# Altium PCB Circuit.PcbDoc (part 2 of 2)
Units mm, origin at the board's own origin, x right, y up, seen from the top; angles counter-clockwise.
Board outline 134.47 x 95.89 mm, 2 copper layers (Top Layer, Bottom Layer); 91 components, 54 nets, 361 pads, 33 vias.
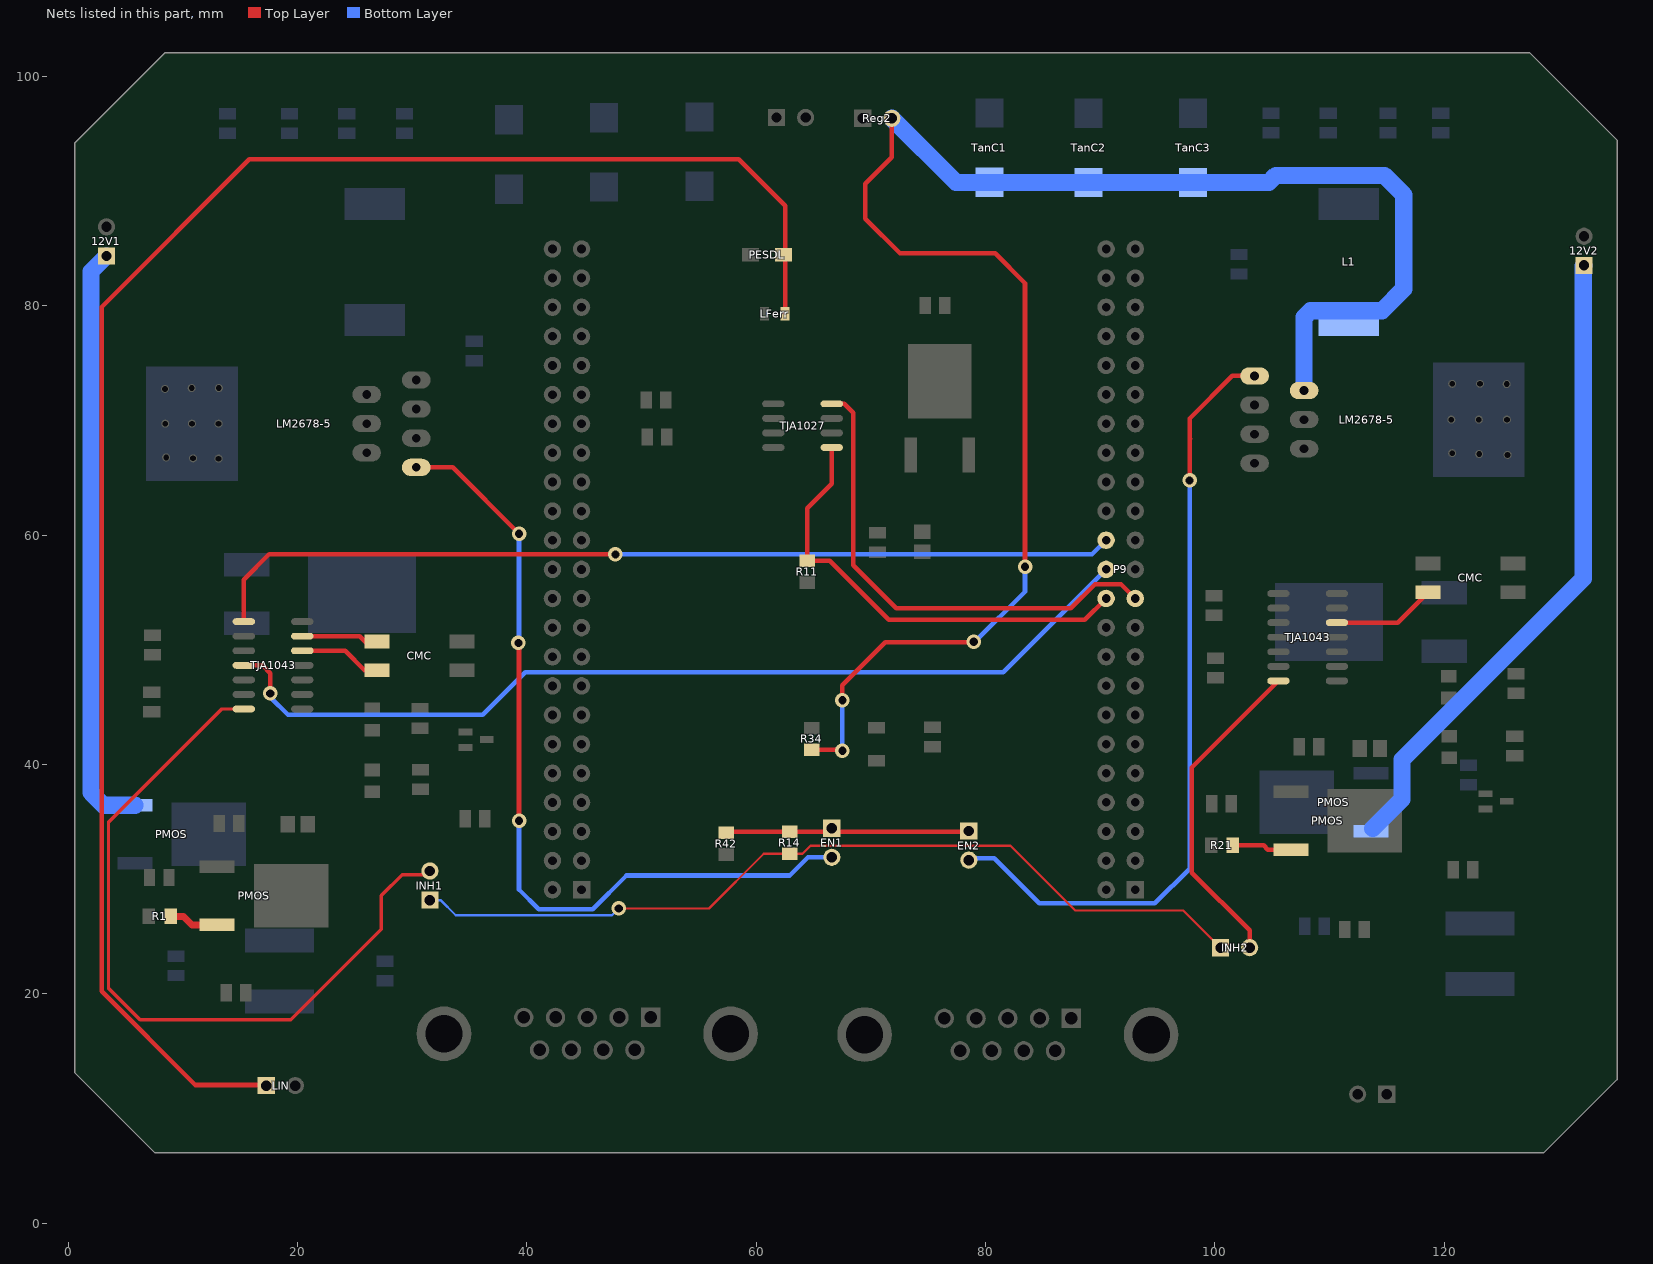
[diagram p2: the nets of this part, all layers, seen from the top]

## Via types
v1: diameter 1.27, hole 0.711, Top Layer to Bottom Layer, 33 vias

## Nets (pads, with @x,y where several pads share a name; then routed paths per layer and width w, separated by ;. In a path a pad name is that pad's centre, name@x,y a point inside that pad or via, vN(x,y) a via of type N, cw(c..) or ccw(c..) an arc to the next point about the centre after c; other vN are vias at no path point) (continued)
NetCMC2_IN2: CMC.IN2@118.6,55.025 TJA1043.CANL@110.65,52.37 | length 9
  Top Layer w0.4: TJA1043.CANL@110.65,52.37 115.945,52.37 CMC.IN2@118.6,55.025
NetCMC_IN1: CMC.IN1@26.95,50.725 TJA1043.CANH@20.425,51.19 | length 7
  Top Layer w0.4: TJA1043.CANH@20.425,51.19 25.435,51.19 26.225,50.4 26.625,50.4 CMC.IN1@26.95,50.725
NetCMC_IN2: CMC.IN2@26.95,48.225 TJA1043.CANL@20.425,49.92 | length 7.4
  Top Layer w0.4: TJA1043.CANL@20.3,49.92 TJA1043.CANL@20.425,49.92 24.155,49.92 25.85,48.225 CMC.IN2@26.95,48.225
NetJ_12V1_1: 12V1.1 PMOS.S@5.825,36.454 | length 51.6
  Bottom Layer w1.5: 12V1.1@3.35,84.35 2,83 2,37.55 3.096,36.454 PMOS.S@5.825,36.454
NetJ_12V2_1: 12V2.1 PMOS.S@113.6,34.171 | length 56.7
  Bottom Layer w1.5: PMOS.S@113.775,34.425 116.325,36.975 116.325,40.425 132.125,56.225 132.125,83.45 12V2.1@132.2,83.525
NetJ_EN1_1: EN1.1 EN2.1 R14.2 R42.2 | length 21.2
  Top Layer w0.4: R42.2@57.475,34.125 R14.2@62.925,34.125 69.4,34.125 ; 69.325,34.125 EN2.1@78.55,34.125
NetJ_EN1_2: EN1.2 LM2678-5.EN@30.358,65.915 | length 72.2
  Top Layer w0.4: LM2678-5.EN@30.358,65.915 33.535,65.915 v1(39.325,60.125) ; v1(39.325,35.1) v1@39.325,50.55
  Bottom Layer w0.4: v1(39.275,50.6) 39.325,50.65 v1(39.325,60.125) ; v1(39.325,35.1) 39.325,29.1 41.05,27.375 45.75,27.375 48.7,30.325 62.94,30.325 64.525,31.91 EN1.2@66.6,31.91
NetJ_EN2_2: EN2.2 LM2678-5.EN@103.467,73.885 | length 69
  Top Layer w0.4: v1(97.8,64.775) 97.8,68.35 ; 97.825,68.1 97.825,70.175 101.535,73.885 LM2678-5.EN@103.467,73.885 ; 97.825,68.4 97.85,68.4
  Bottom Layer w0.4: EN2.2@78.55,31.66 78.715,31.825 80.775,31.825 84.7,27.9 94.775,27.9 97.8,30.925 v1(97.8,64.775) v1@97.85,64.775
NetJ_INH2_1: INH1.1 INH2.1 R14.1 | length 75.7
  Top Layer w0.2: v1(48.025,27.45) 55.9,27.45 60.675,32.225 R14.1@62.925,32.225 64.05,32.225 64.735,32.91 82.19,32.91 87.825,27.275 97.25,27.275 INH2.1@100.5,24.025
  Bottom Layer w0.2: INH1.1@31.55,28.175 32.475,28.175 33.8,26.85 47.425,26.85 v1(48.025,27.45)
NetJ_INH2_2: INH2.2 TJA1043.INH@105.55,47.29 | length 28.5
  Top Layer w0.4: INH2.2@103.04,24.025 103.04,25.535 98,30.575 98,39.74 TJA1043.INH@105.55,47.29
NetJ_INH_2: INH1.2 TJA1043.INH@15.325,44.84 | length 66.2
  Top Layer w0.3: TJA1043.INH@15.325,44.84 13.39,44.84 3.525,34.975 3.525,20.5 6.275,17.75 19.425,17.75 27.325,25.65 27.325,28.575 29.14,30.39 INH1.2@31.275,30.39
NetL1_U_5v_REG_2_2: L1.2@111.675,78.775 LM2678-5.FB@107.785,72.615 R34.1 Reg2.2 TanC1.1@80.35,90.775 TanC2.1@89,90.75 TanC3.1@98.1,90.75 | length 152.8
  Top Layer w0.4: R34.1@64.85,41.275 67.45,41.275 v1(67.525,41.2) ; v1(67.525,45.6) 67.525,46.9 71.275,50.65 v1@79.025,50.65 ; Reg2.2@71.84,96.35 71.84,92.965 69.525,90.65 69.525,87.6 72.55,84.575 80.85,84.575 83.45,81.975 v1(83.45,57.25)
  Bottom Layer w0.4: v1(67.525,41.2) v1(67.525,45.6) ; v1(78.975,50.7) 79.075,50.7 83.45,55.075 v1(83.45,57.25)
  Bottom Layer w1.5: Reg2.2@71.84,96.35 77.44,90.75 TanC2.1@89,90.75 TanC3.1@98.1,90.75 104.7,90.75 105.325,91.375 114.775,91.375 116.475,89.675 116.475,81.475 114.575,79.575 108.35,79.575 107.785,79.01 LM2678-5.FB@107.785,72.615
NetLFerrite_2: LFerr.2 LIN.1 PESDL.D2 | length 153.6
  Top Layer w0.4: LIN.1@17.275,12.05 11.1,12.05 2.925,20.225 2.925,79.9 15.8,92.775 58.475,92.775 62.525,88.725 LFerr.2@62.525,79.1
NetPMOS_U_EMI_Prot_Circ1_S: PMOS.S@13,26.021 R1.1 | length 4.4
  Top Layer w0.6: R1.1@8.95,26.75 10.075,26.75 10.804,26.021 PMOS.S@13,26.021
NetPMOS_U_EMI_Prot_Circ2_S: PMOS.S@106.625,32.571 R21.1 | length 5.2
  Top Layer w0.4: R21.1@101.575,32.95 104.25,32.95 104.629,32.571 PMOS.S@106.625,32.571
UART1_RXD: P9.26 TJA1043.TXD@15.325,52.46 | length 80.3
  Top Layer w0.4: TJA1043.TXD@15.325,52.46 15.325,56.125 17.525,58.325 v1(47.725,58.325)
  Bottom Layer w0.4: v1(47.725,58.325) 89.289,58.325 P9.26@90.522,59.558
UART1_TXD: P9.24 TJA1043.RXD@15.325,48.65 | length 83.5
  Top Layer w0.4: TJA1043.RXD@15.325,48.65 16.95,48.65 17.625,47.975 v1(17.625,46.2)
  Bottom Layer w0.4: v1(17.625,46.2) 17.625,45.875 19.175,44.325 36.15,44.325 39.875,48.05 81.554,48.05 P9.24@90.522,57.018
UART2_RXD: P9.22 R11.1 TJA1027.RXDL | length 39.7
  Top Layer w0.4: TJA1027.RXDL@66.6,67.645 66.6,64.5 64.45,62.35 R11.1@64.45,57.775 66.425,57.775 71.575,52.625 88.669,52.625 P9.22@90.522,54.478
UART2_TXD: P9.21 TJA1027.TXDL | length 43
  Top Layer w0.4: TJA1027.TXDL@66.6,71.455 67.695,71.455 68.475,70.675 68.475,57.375 72.225,53.625 87.45,53.625 89.55,55.725 91.815,55.725 P9.21@93.062,54.478
pads on no net: CANC1.1 CANC1.3 CANC1.4 CANC1.6 CANC1.8 CANC1.9 CANC1.10 CANC1.11 CANC2.1 CANC2.3 CANC2.4 CANC2.6 CANC2.8 CANC2.9 CANC2.10 CANC2.11 LM2678-5.NC P8.1 P8.2 P8.3 P8.6 P8.7 P8.8 P8.9 P8.10 P8.11 P8.13 P8.14 P8.15 P8.16 P8.19 P8.20 P8.21 P8.22 P8.24 P8.25 P8.27 P8.28 P8.29 P8.30 P8.31 P8.32 P8.33 P8.34 P8.35 P8.36 P8.37 P8.38 P8.39 P8.40 P8.41 P8.42 P8.43 P8.44 P8.45 P8.46 P9.1 P9.2 P9.3 P9.4 P9.5 P9.6 P9.7 P9.8 P9.9 P9.10 P9.11 P9.12 P9.13 P9.14 P9.15 P9.16 P9.17 P9.18 P9.23 P9.25 P9.27 P9.28 P9.29 P9.30 P9.31 P9.32 P9.33 P9.34 P9.35 P9.36 P9.37 P9.38 P9.39 P9.40 P9.41 P9.42 P9.43 P9.44 P9.45 P9.46 TJA1027.NC

## Polygon pours and split planes (outlines as drawn)
NetC1_U_5v_REG_2_2 on Bottom Layer "123" (solid, remove dead copper, pour order 144): 124.025,86.124 122.851,87.25 119.985,87.25 119.985,80.31 117.802,78.215 115.4,75.911 115.4,74.575 115.946,74.575 120.968,79.394 121.35,79.76 121.35,83.374 121.35,85.26 122.497,86.36 123.97,86.36 119.276,86.36 119.194,86.438
NetC1_U_5v_REG_2_2 on Bottom Layer "123" (solid, remove dead copper, pour order 143): 114.275,75.825 114.125,75.975 110.375,75.975 110.375,74.8 110.3,74.725 110.425,74.6 113.875,74.6 113.875,75.425 114.275,75.825
NetC1_U_5v_REG_2_2 on Bottom Layer "123" (solid, remove dead copper, pour order 142): 129.224,87.389 122.401,93.991 121.3,93.991 121.235,93.991 119.4,92.215 120.48,91.17 120.48,86.072 129.461,86.072 130.746,87.315 131.275,87.827 131.275,88.475 131.275,88.559 123.33,96.247 123.092,96.017 121.3,96.017 121.3,93.427 121.775,92.967
NetC2_2 on Bottom Layer "123" (solid, remove dead copper, pour order 131): 68.825,94.55 65.999,97.376 63.921,97.376 63.921,94.579 64.225,94.275 64.35,94.15 68.525,94.15 68.525,94.3 68.8,94.575
NetBAT_IN_2 on Bottom Layer "123" (solid, remove dead copper, pour order 122): 16.3,35.1 16.3,35.55 16.803,36.025 16.883,36.1 18.472,36.1 19.082,36.1 19.771,35.45 19.982,35.25 19.982,29.575 19.982,29.5 21.625,27.95 20.963,27.325 18.87,27.325 18.87,32.675 16.3,35.1
NetBAT_IN_2 on Bottom Layer "123" (solid, remove dead copper, pour order 120): 17.65,35.8 17,35.8 16.525,35.325 16.3,35.1 16.3,27.375 19.55,27.375 19.85,27.675 19.425,28.1 19.425,34.4 19.425,34.725 18.3,35.85 18.275,35.825 17.025,35.825
NetCc1_U_5v_REG_1_1 on Bottom Layer "123" (solid, remove dead copper, pour order 119): 29.098,69.777 29.1,69.775 29.1,69.575 29.1,69.525 29.225,69.4 29.25,69.375 31.425,69.375 33.2,69.375 38,74.175 38.175,74.35 38.175,77.075 35.75,77.075 33.95,75.275 29.098,70.423 29.098,69.777
NetCc1_U_5v_REG_1_1 on Bottom Layer "123" (solid, remove dead copper, pour order 117): 29.05,72.125 29.05,72.1 28.55,71.6 28.55,71.3 28.55,70.325 28.95,69.925 29.1,69.775 31.425,69.775 32,69.775 36.7,74.475 36.925,74.7 36.925,76.35 36.925,76.85 36.45,77.325 36.375,77.4 34.65,77.4 34.65,77.05 30.25,72.65 28.9,72.65 28.725,72.65 27.95,71.875 28,71.825 28,70.625 28.25,70.625 28.625,70.25
NetCc1_U_5v_REG_1_2 on Bottom Layer "123" (solid, remove dead copper, pour order 115): 35.662,75.975 38.038,75.975 38.837,76.775 37.437,78.175 37.437,78.575 37.063,78.575 35.188,76.7 35.662,76.225 35.662,75.975
NetCc1_U_5v_REG_1_2 on Bottom Layer "123" (solid, remove dead copper, pour order 112): 29.3,74.05 29.3,72.85 29.875,72.275 29.95,72.35 31.425,72.35 32.05,72.35 35.8,76.1 36.2,76.5 37.75,76.5 37.75,65.425 36.527,64.202 37.604,63.125 39.65,63.125 39.65,79.1 38.475,80.275 37.775,79.575 35.15,79.575 34.7,79.575 29.3,74.175 29.3,73.45
NetCc1_U_5v_REG_1_2 on Bottom Layer "123" (solid, remove dead copper, pour order 111): 29.3,74.425 29.3,75.175 33.525,79.4 33.675,79.55 33.675,81.55 33.675,81.675 30.25,85.1 28.225,87.125 28.225,88.2 31.525,88.2 39.7,80.025 34.1,74.425 29.3,74.425
NetCc1_U_5v_REG_1_2 on Bottom Layer "123" (solid, remove dead copper, pour order 108): 24.8,90.725 24.725,90.8 23.775,90.8 23.775,90.3 23.375,89.9 23.35,89.875 23.35,87.775 23.35,87.7 23.925,87.125 24.2,86.85 28.775,86.85 28.85,86.85 31.55,84.15 34,81.7 34,80.225 34,79.125 29.4,74.525 29.3,74.425 29.3,73.35 31.525,73.35 37.075,78.9 37.1,78.925 39.025,78.925 39.275,78.925 39.725,78.475 39.9,78.3 39.9,66.975 39.3,66.975 37,64.675 36.527,64.202 35.197,64.202 35.2,64.202 38.744,60.658 41.2,63.113 41.2,69.325 41.2,79.35 30.3,90.25 30.025,90.525 23.95,90.525
NetC1_U_5v_REG_1_2 on Bottom Layer "123" (solid, remove dead copper, pour order 107): 1.612,85.536 1.612,87.537 2.225,88.42 2.35,88.6 4.35,88.6 10.7,88.6 11.9,90.329 12.35,89.681 12.35,87.123 2.078,87.123 1.612,86.453
NetC1_U_5v_REG_1_2 on Bottom Layer "123" (solid, remove dead copper, pour order 105): 30.1,93.889 29.407,93.225 16.036,93.225 14.914,92.15 14.679,91.925 14.679,84.925 14.679,84.9 20.759,79.075 27.099,73 27.099,71.75 24.203,71.75 13.74,81.775 11,84.4 11,94.975 11,95.15 12.096,96.2 12.2,96.3 15.853,96.3 27.647,96.3 30.048,94
NetC2_2 on Bottom Layer "123" (solid, remove dead copper, pour order 103): 36.3,90.175 36.275,90.2 22.05,90.2 22.05,91.95 22.575,92.475 22.625,92.525 34.85,92.525 34.85,91.625 36.225,90.25
NetC2_2 on Bottom Layer "123" (solid, remove dead copper, pour order 101): 63.921,97.376 63.921,97.4 64.998,97.4 66.099,96.322 66.45,95.979 66.45,94.118 66.45,93.799 64.747,92.133 59.84,87.332 38.081,87.332 37.405,87.332 34.25,90.419 34.125,90.541 25.562,90.541 23.208,90.541 22.757,90.1 21.906,89.267 21.906,86.181 21.906,86.132 26.864,81.282 27.439,80.718 28.741,80.718 29.017,80.718 29.918,79.836 30.069,79.689 30.069,77.313 30.069,77.117 28.967,76.04 28.842,75.917 28.842,73.1 26.864,73.1 22.932,76.946 22.782,77.093 22.782,79.959 22.782,80.008 18.526,84.172 18.125,84.564 18.125,90.247 18.125,90.835 20.253,92.917 20.378,93.04 28.867,93.04 59.489,93.04 63.921,97.376
NetC1_U_5v_REG_1_2 on Bottom Layer "123" (solid, remove dead copper, pour order 99): 2.088,87.258 1.637,86.805 1.637,85.721 1.637,85.545 2.113,85.066 2.263,84.915 9.641,84.915 10.441,84.915 20.421,74.86 24.773,70.475 26.798,70.475 27.124,70.475 27.374,70.727 27.649,71.004 27.649,72.264 26.973,72.264 24.272,74.986 14.818,84.511 14.818,86.149 14.818,92.248 16.194,93.634 16.369,93.81 25.373,93.81 30.1,93.81 30.4,94.112 30.475,94.188 30.475,95.272 30.475,95.902 30,96.38 29.825,96.557 13.843,96.557 13.618,96.557 12.417,95.347 12.267,95.196 12.267,89.249 12.267,89.198 11.267,88.191 10.942,87.863 2.838,87.863 2.688,87.863 1.663,86.83
NetJ_12V1_1 on Bottom Layer "123" (solid, remove dead copper, pour order 97): 8.275,35.632 8.275,36.869 7.886,37.222 7.47,37.601 4.694,37.601 4.639,37.601 4.389,37.828 4.25,37.954 4.25,41.237 4.25,82.445 4.417,82.596 5.055,83.177 5.055,84.339 5.055,84.591 4.167,85.399 4.056,85.5 2.446,85.5 2.391,85.5 1.253,84.465 1.225,84.44 1.225,83.531 1.225,36.136 2.335,35.127 2.502,34.975 7.637,34.975 7.664,34.975 8.247,35.505
NetC2_U_EMI_Prot_1_1 on Bottom Layer "123" (solid, remove dead copper, pour order 95): 22.325,19.95 19.325,22.95 15.85,22.95 15.85,23.675 14.95,24.575 14.775,24.75 14.775,29.8 14.775,30.4 15.475,31.1 16.05,31.675 16.05,36.2 16.05,36.35 15.625,36.775 15.55,36.85 9.15,36.85 8.95,36.85 8.625,36.525 8.675,36.475 8.675,31.55 8.675,31.45 9.3,30.825 10.975,29.15 10.975,25.575 10.975,24.725 8.6,22.35 8.275,22.025 8.275,20.975 8.275,20.775 10.675,18.375 11.45,17.6 21.475,17.6 21.55,17.6 22.325,18.375 22.325,19.925
NetBAT_IN_2 on Bottom Layer "123" (solid, remove dead copper, pour order 93): 94.75,17.025 94.75,17.675 92.475,19.95 92.275,20.15 88.25,20.15 30.5,20.15 28.575,22.075 26.825,23.825 26.825,25.875 29.65,25.875 30.325,26.55 62.275,26.55 96.3,26.55 100.85,22 95.65,16.8 95.15,16.8 95.15,17.3 94.575,17.875
NetCc1_U_5v_REG_2_1 on Bottom Layer "123" (solid, remove dead copper, pour order 91): 104.9,68.3 104.9,69.525 104.2,70.225 102.825,70.225 102.825,68.425 103.4,67.85 103.85,68.3 104.9,68.3
NetCc1_U_5v_REG_2_1 on Bottom Layer "123" (solid, remove dead copper, pour order 90): 104.65,68.875 104.65,69.45 104.3,69.8 103.9,70.2 103.15,70.2 102.95,70.2 101.825,71.325 101.775,71.375 101.775,75.275 101.775,79.5 103.8,81.525 104.175,81.9 104.175,84.075 99.8,84.075 97.35,81.625 97.45,81.525 97.45,70.9 98.35,70.9 101.625,67.625 104.15,67.625 104.225,67.625 104.85,68.25 104.9,68.3 104.9,69.35 104.9,69.525 104.175,70.25 104.15,70.225 103.825,70.225
NetCc1_U_5v_REG_2_2 on Bottom Layer "123" (solid, remove dead copper, pour order 89): 103.325,83.75 113.075,83.75 116.075,86.75 116.5,87.175 116.5,89.275 107.725,89.275 103,84.55 103.325,84.225 103.325,83.75
NetCc1_U_5v_REG_2_2 on Bottom Layer "123" (solid, remove dead copper, pour order 88): 105.375,62.2 105.375,62.15 104.675,62.85 104.675,66.3 104.675,66.35 103.975,67.05 103.725,67.3 102.3,67.3 101.925,67.3 98.625,70.6 98.4,70.825 98.4,81.85 98.4,81.95 100.25,83.8 100.475,83.575 102.5,83.575 103.175,83.575 106.925,87.325 106.95,87.3 108.1,87.3 108.15,87.3 108.7,86.75 108.825,86.625 113.95,86.625 114.925,86.625 115.925,87.625 116.275,87.975 116.275,90.425 116.275,90.55 115.3,91.525 115.05,91.775 108.875,91.775 105.175,91.775 100.2,86.8 99.8,86.4 96.75,86.4 96.55,86.4 95.45,85.3 95.375,85.225 95.375,70.7 95.375,70.15 100.425,65.1 100.65,64.875 100.65,64.3 100.65,64.254 100.325,63.929 102.704,61.55 104.65,61.55 104.75,61.55 105.375,62.175 105.304,62.246 105.304,62.455
NetC1_U_5v_REG_2_2 on Bottom Layer "123" (solid, remove dead copper, pour order 87): 102.962,93.688 101.688,93.688 100.85,94.525 100.85,96.05 100.85,96.125 101.65,96.925 104.175,96.925 104.175,95.4 104.6,94.975 103.313,93.688 102.962,93.688
NetL1_U_5v_REG_2_2 on Bottom Layer "123" (solid, remove dead copper, pour order 86): 107.922,72.865 107.987,72.8 109.037,72.8 109.287,72.8 109.712,73.225 109.937,73.45 109.937,76.55 109.937,76.825 110.212,77.1 110.462,77.35 114.037,77.35 115.612,77.35 119.087,80.825 119.337,81.075 119.337,92.65 119.337,92.725 117.387,94.675 117.087,94.375 103.687,94.375 102.837,94.375 102.187,93.725 101.862,93.4 95.737,93.4 78.912,93.4 75.137,97.175 74.837,97.475 71.787,97.475 71.662,97.475 71.137,96.95 70.862,96.675 70.862,95.475 70.862,94.75 76.637,88.975 77.037,88.575 86.637,88.575 103.663,88.575 106.762,91.675 106.888,91.8 113.487,91.8 113.662,91.8 115.762,89.7 115.837,89.625 115.837,81.6 115.837,81.475 114.762,80.4 114.612,80.25 113.962,80.25 107.887,80.25 106.837,79.2 106.262,78.625 106.262,73.875 106.262,73.35 107.262,72.35 107.387,72.475 108.812,72.475
NetC1_U_5v_REG_2_2 on Bottom Layer "123" (solid, remove dead copper, pour order 85): 131.329,86.302 131.329,87.988 122.99,96.469 122.702,96.763 104.486,96.763 103.02,96.763 102.059,95.785 101.963,95.687 101.963,94.954 101.963,94.734 102.78,93.903 102.924,93.756 115.06,93.756 116.526,93.756 117.943,92.314 118.04,92.217 118.04,81.707 118.04,81.047 115.252,78.212 109.677,72.542 109.677,70.147 109.34,69.805 109.292,69.756 107.249,69.756 106.985,69.756 105.928,68.681 105.783,68.534 105.783,67.679 105.783,67.459 106.24,66.994 106.48,66.75 110.902,66.75 111.07,66.75 113.113,68.827 113.281,68.998 113.281,71.589 113.281,72.322 120.371,79.532 120.851,80.021 120.851,92.119 120.851,92.339 121.476,92.974 121.572,93.072 122.437,93.072 122.509,93.072 125.273,90.261 129.695,85.764 130.56,85.764 130.608,85.764 131.425,86.595
NetJ_12V2_1 on Bottom Layer "123" (solid, remove dead copper, pour order 84): 108.361,33.627 109.385,32.777 112.037,32.777 112.399,32.777 115.08,35.002 116.014,35.777 116.014,40.377 116.014,40.577 122.734,46.152 134.456,55.877 134.456,83.952 134.456,84.052 133.853,84.552 133.732,84.652 132.015,84.652 131.623,84.652 131.111,84.227 131.02,84.152 131.02,57.252 131.02,57.052 127.224,53.902 112.338,41.552 112.338,37.527 112.338,37.327 109.566,35.027 109.536,35.002 109.144,35.002 108.813,35.002 108.421,34.677 108.331,34.602 108.331,33.627
NetC2_U_EMI_Prot_2_1 on Bottom Layer "123" (solid, remove dead copper, pour order 83): 121.561,23.211 122.976,24.626 123.473,24.626 125.848,24.626 128.173,22.301 128.173,19.101 127.973,19.101 126.373,17.501 121.434,22.439 121.434,23.213
NetC2_U_EMI_Prot_2_1 on Bottom Layer "123" (solid, remove dead copper, pour order 82): 120.65,24.325 120.675,24.3 127.95,24.3 127.95,19.475 126.05,17.575 125.925,17.45 110.85,17.45 109.8,17.45 105.125,22.125 104.5,22.75 104.5,32.175 104.5,33.075 103.55,34.025 102.825,34.75 102.825,39.5 102.825,39.95 103.975,41.1 104.375,41.5 109.125,41.5 109.55,41.5 111.05,40 111.625,39.425 111.625,33.65 111.625,30.65 109.275,28.3 108.825,27.85 108.825,24.325 108.825,24.125 110.75,22.2 120.05,22.2 120.525,22.2 121.675,23.35 123.225,24.9 131.75,24.9 131.75,21.85 127.275,17.375
NetBAT_IN_2 on Bottom Layer "123" (solid, remove dead copper, pour order 81): 125.63,24 125.803,24 127.647,22.4 127.906,22.175 127.906,19.7 127.906,19.625 126.725,18.6 122.547,14.975 122.547,13.825 124.996,13.825 131.278,19.275 131.422,19.4 131.422,24.7 126.783,24.7 125.918,23.95
NetBAT_IN_2 on Bottom Layer "123" (solid, remove dead copper, pour order 79): 126.908,23.804 126.933,23.804 128.465,23.804 129.18,23.069 129.563,22.675 129.563,19.262 129.563,19.104 128.542,18.054 126.397,15.849 118.481,15.849 109.826,15.849 108.192,17.529 103.34,22.517 99.025,22.517 99.025,20.076 106.838,12.043 107.196,11.675 125.886,11.675 126.55,11.675 134.593,19.945 134.925,20.286 134.925,25.3 128.95,25.3 128.082,24.407 128.542,23.935 128.542,23.725
NetBAT_IN_2 on Bottom Layer "123" (solid, remove dead copper, pour order 78): 135.45,20.553 122.212,7.3 101.173,7.3 100.947,7.3 96.794,11.457 95.083,13.171 95.083,18.21 95.083,18.84 93.371,20.553 93.044,20.881 61.435,20.881 29.7,20.881 28.693,21.888 28.668,21.914 20.841,21.914 16.437,21.914 14.952,23.4 14.625,23.728 14.625,25.97 14.625,26.121 16.16,27.658 16.437,27.935 25.975,27.935 29.171,27.935 31.109,25.995 31.235,25.869 49.581,25.869 97.146,25.869 108.169,14.834 108.371,14.632 125.66,14.632 132.304,21.284 132.405,21.384 132.405,23.728 122.816,23.728 121.382,25.164 120.929,25.617 120.929,27.054 120.929,27.154 122.087,28.313 123.471,29.699 129.41,29.699 129.435,29.699 130.593,30.858 130.694,30.959 130.694,35.847 130.694,36.149 129.41,37.434 128.605,38.241 124.528,38.241 124.201,38.241 123.219,39.223 122.816,39.626 122.816,41.289 122.816,41.516 123.873,42.574 123.974,42.675 130.694,42.675 132.48,42.675 134.922,40.231 134.972,40.181 134.972,20.125
GND on Bottom Layer "123" (solid, pour order 110): 0.614,94.103 8.639,102.127 8.639,102.378 126.964,102.378 134.864,94.478 135.039,94.303 135.039,12.753 128.669,6.383 7.509,6.383 0.564,13.328 0.564,94.453
NetCc1_U_5v_REG_1_2 on Bottom Layer "123" (solid, remove dead copper, pour order 73): 17.209,60.529 20.907,64.225 34.807,64.225 35.174,64.225 38.925,60.477 38.925,52.745 38.925,51.592 35.988,48.656 35.856,48.525 14.717,48.525 13.379,48.525 11.307,50.596 11.15,50.753 11.15,53.321 11.15,53.793 12.697,55.34 12.933,55.576 17.759,55.576 17.943,55.576 18.599,56.231 18.677,56.309 18.677,61.997
NetCc1_U_5v_REG_2_2 on Bottom Layer "123" (solid, remove dead copper, pour order 74): 99.225,64.104 104.02,64.104 109.285,58.692 109.285,57.344 113.035,57.344 115.125,55.196 115.227,55.091 115.227,53.09 115.227,52.859 116.108,51.953 116.149,51.911 119.694,51.911 119.919,51.911 120.493,51.321 120.575,51.237 120.575,49.026 120.575,48.858 119.592,47.847 117.235,45.425 102.749,45.425 101.909,45.425 99.266,48.142 99.245,48.163 99.245,62.63 99.245,62.84 100.495,64.125
NetCc1_U_5v_REG_2_2 on Bottom Layer "123" (solid, remove dead copper, pour order 75): 109.325,55.875 107.772,55.875 107.772,60.27 115.611,52.431 115.611,46.983
NetBAT_IN_2 on Bottom Layer "123" (solid, remove dead copper, pour order 100): 16.3,35.55 16.3,36.65 16.95,37.3 17.05,37.4 19.025,37.4 19.65,37.4 20.9,36.15 21.025,36.025 21.025,31.35 21.025,31.125 23.925,28.225 25.3,26.85 34.825,26.85 35.15,26.85 35.975,26.025 34,24.05 15.8,24.05 15.8,36.15 16.3,36.65
NetC2_U_EMI_Prot_1_1 on Bottom Layer "123" (solid, remove dead copper, pour order 102): 20.33,21.913 20.342,21.925 22,21.925 22.125,21.925 22.875,21.175 22.875,18.35 22.875,18.25 21.275,16.65 20.825,16.2 11.225,16.2 11.025,16.2 8.375,18.85 8.275,18.95 8.275,22.025 10.975,24.725 13.787,21.913 20.33,21.913
NetC2_U_EMI_Prot_1_1 on Bottom Layer "123" (solid, remove dead copper, pour order 104): 10.271,24.021 10.271,29.854 8.675,31.45 8.932,31.707 16.05,31.707 16.05,27.776 14.775,26.501 12.294,24.021 10.271,24.021
NetJ_12V1_1 on Bottom Layer "123" (solid, remove dead copper, pour order 106): 8.275,36.871 8.275,37.155 7.752,37.734 7.275,38.263 5.207,38.263 5.185,38.263 4.957,38.515 4.912,38.565 4.912,41.765 4.912,83.177 5.139,83.429 4.98,83.252 3.48,83.252 3.48,37.885 4.707,36.525 5.02,36.871 8.275,36.871
NetC2_2 on Bottom Layer "123" (solid, remove dead copper, pour order 109): 29.017,80.718 22.975,86.76 22.975,89.75 23.925,89.75 24.95,90.775 24.85,90.875 20.65,90.875 20.65,85.2 20.525,85.075 25.6,80 28.575,80 28.575,80.276 29.017,80.718
NetCc1_U_5v_REG_1_2 on Bottom Layer "123" (solid, remove dead copper, pour order 113): 29.3,75.175 29.3,75.825 31.225,77.75 31.25,77.775 31.25,78.625 31.25,79.075 30.225,80.1 23.075,87.25 23.075,90.05 23.075,90.075 23.65,90.65 26.65,87.65 29.25,87.65 29.7,87.65 35.95,81.4 36.1,81.25 36.1,79.075 36.1,78.125 31.375,73.4 30.35,74.425 29.3,74.425 29.3,75.175
NetC1_U_5v_REG_1_2 on Bottom Layer "123" (solid, remove dead copper, pour order 114): 19.925,93.275 17.725,91.075 17.725,84.55 17.725,84.3 22.75,79.275 27.55,74.475 27.55,70.5 23.225,70.5 9.575,84.15 6.025,84.15 3.775,84.15 1.675,86.25 4.025,88.6 12.35,88.6 12.35,93.3 13.8,94.75 13.875,94.675 19.925,94.675 19.925,93.25
NetC2_2 on Bottom Layer "123" (solid, remove dead copper, pour order 116): 28.95,73.725 29.975,74.75 29.975,75.825 29.975,75.925 32.025,77.975 31.65,78.35 31.65,80.55 31.65,82.875 23.7,90.825 22.075,89.2 22.075,84.325 22.075,84.25 28.675,77.65 28.425,77.4 28.425,74 29.65,74 32.675,77.025
NetCc1_U_5v_REG_1_2 on Bottom Layer "123" (solid, pour order 118): 24.543,64.214 25.33,65 31.75,65 31.8,65 33.05,66.25 33.05,66.275 33.05,69.6 37.975,74.525 38.925,73.575 38.925,64.125 24.632,64.125 24.543,64.214
NetC2_2 on Bottom Layer "123" (solid, remove dead copper, pour order 121): 37.405,87.332 31.968,87.332 28.375,90.925 28.925,91.475 34.975,91.475 34.975,91.225 37.825,88.375 37.405,87.955 37.405,87.332
NetL1_U_5v_REG_2_2 on Bottom Layer "123" (solid, remove dead copper, pour order 123): 107.887,80.25 109.187,81.55 113.8,81.55 113.8,81.65 116.025,83.875 117.35,82.55 117.35,81.775 117.35,81.725 114.175,78.55 112.475,80.25 107.887,80.25
NetCc1_U_5v_REG_2_1 on Bottom Layer "123" (solid, remove dead copper, pour order 124): 102.95,70.2 102.95,71.325 102.225,72.05 102.175,72.1 102.175,73.45 102.175,79.125 103.95,80.9 104.175,81.125 104.175,81.9 103.475,81.9 102.875,82.5 100.425,80.05 100.425,78.725 100.425,72.225 102.625,70.025 102.8,70.2 102.95,70.2
NetCc1_U_5v_REG_2_1 on Bottom Layer "123" (solid, remove dead copper, pour order 126): 104.9,69.525 104.9,70.05 104.275,70.675 104.247,70.703 102.325,70.703 102.325,69.9 102.4,69.825 102.7,69.525 104.9,69.525
NetL1_U_5v_REG_2_2 on Bottom Layer "123" (solid, remove dead copper, pour order 128): 106.262,73.35 106.262,72.338 106.85,71.75 106.875,71.725 108.7,71.725 109.15,71.725 110.075,72.65 110.425,73 110.425,76.9 110.425,77.025 111,77.6 110.775,77.825 108.225,77.825 108.225,75.413 106.262,73.45
NetL1_U_5v_REG_2_2 on Bottom Layer "123" (solid, remove dead copper, pour order 130): 110.425,76.384 111.4,77.359 111.4,78.1 110.275,78.1 110.05,77.875 109.6,77.425 109.6,76.825 109.984,76.825 110.425,76.384
NetC1_U_5v_REG_2_2 on Bottom Layer "123" (solid, remove dead copper, pour order 133): 105.783,68.534 105.783,68.933 106.375,69.525 106.606,69.756 109.127,69.756 109.175,69.804 109.175,71.75 109.175,72.688 109.937,73.45 110,73.513 110,76.3 110,76.475 111.4,77.875 111.55,77.725 114.85,77.725 114.85,77.75 118.175,81.075 118.3,81.2 118.3,94.075 118.3,92.775 121.275,89.8 120.225,88.75 120.225,79.55 120.225,78.875 112.85,71.5 109.884,68.534 105.783,68.534
NetJ_12V2_1 on Bottom Layer "123" (solid, remove dead copper, pour order 134): 131.125,63.025 131.15,63
NetJ_12V2_1 on Bottom Layer "123" (solid, remove dead copper, pour order 136): 131.05,59.3 118.325,46.575 118.325,43.725 119.075,43.725 132.625,57.275 131.925,57.975 131.925,59.375 131.125,59.375 131.025,59.275
NetBAT_IN_2 on Bottom Layer "123" (solid, remove dead copper, pour order 138): 129.875,37.275 129.85,37.3 129.85,29.575 131.25,28.175 132.725,29.65 132.725,30.325 132.725,36.35 131.775,37.3 131.525,37.05 129.85,37.05
NetBAT_IN_2 on Top Layer "123" (solid, remove dead copper, pour order 140): 111.8,14.6 110.3,13.1 110.3,10.225 110.3,9.725 110.775,9.25 110.825,9.2 112.475,9.2 112.475,14.45 112.575,14.55 112.525,14.6 111.8,14.6
NetBAT_IN_2 on Top Layer "123" (solid, remove dead copper, pour order 137): 111.85,9.2 113.325,9.2 114.125,10 114.125,13.6 114.125,14.75 118.325,18.95 118.625,19.25 118.625,42.525 118.625,42.9 116.925,44.6 116.775,44.45 112.425,44.45 112.375,44.45 111.75,43.825 111.525,43.6 111.525,42.525 108.725,42.525 108.5,42.3 108.375,42.175 108.375,41.125 108.375,40.85 108.65,40.575 108.775,40.45 113.2,40.45 113.275,40.45 113.475,40.65 113.45,40.675 113.45,42.475 113.45,42.6 113.625,42.775 113.65,42.75 115.875,42.75 116.075,42.75 116.75,42.075 116.85,41.975 116.85,40.95 116.85,19.65 116.625,19.425 111.8,14.6 111.8,13 111.8,9.325 111.95,9.175
NetPMOS_U_EMI_Prot_Circ2_S on Top Layer "123" (solid, remove dead copper, pour order 135): 108.25,32.075 108.325,32.15 108.325,33.15 108.325,33.325 107.95,33.7 107.9,33.75 105.325,33.75 101.075,33.75 100.8,33.475 102.2,32.075 108.25,32.075
NetPMOS_U_EMI_Prot_Circ2_S on Top Layer "123" (solid, remove dead copper, pour order 132): 108.175,33.075 107.6,33.65 101.15,33.65 100.975,33.65 100.825,33.5 100.8,33.475 100.8,32.175 101.05,31.925 101.175,31.8 107.5,31.8 107.975,31.8 108.25,32.075 108.175,32.15 108.175,33.075
NetPMOS_U_EMI_Prot_Circ1_S on Top Layer "123" (solid, remove dead copper, pour order 129): 14.875,26 14.85,26.025 14.85,26.575 14.575,26.85 14.55,26.875 11.2,26.875 10.85,26.875 10.45,27.275 10.125,27.6 8.525,27.6 8.375,27.6 8.15,27.375 8.125,27.35 8.125,26.075 8.125,25.975 8.375,25.725 8.4,25.7 9.775,25.7 9.825,25.7 9.975,25.85 10.025,25.9 10.225,25.9 10.275,25.9 10.725,25.45 10.95,25.225 14.55,25.225 14.575,25.225 14.825,25.475 14.875,25.525 14.875,25.975
NetC2_U_EMI_Prot_Circ1_1 on Top Layer "123" (solid, remove dead copper, pour order 127): 19.95,35.85 19.95,36.075 20.275,36.4 20.35,36.475 21.325,36.475 21.575,36.475 21.85,36.2 22.175,35.875 22.175,32.175 22.175,32.125 22.9,31.4 23.15,31.15 23.15,25.85 23.15,25.675 22.325,24.85 22.05,24.575 20.55,24.575 20.4,24.575 20.25,24.425 20.125,24.3 20.125,23.825 20.125,23.55 15.95,19.375 15,20.325 15,21.05 15,21.15 16.35,22.5 18.325,24.475 18.325,25 18.325,25.05 17.975,25.4 17.9,25.475 16.6,25.475 16.475,25.475 16.15,25.8 15.975,25.975 15.975,31.3 15.975,31.4 16.3,31.725 16.6,32.025 19.8,32.025 19.975,32.025 20.25,32.3 20.275,32.325 20.275,33.25 20.275,34.05 19.95,34.375
NetBAT_IN_2 on Top Layer "123" (solid, remove dead copper, pour order 125): 14.1,35.1 14.125,35.075 14.125,35.85 14.475,36.2 14.725,36.45 18.9,36.45 19.35,36.45 19.8,36 19.95,35.85 19.95,34.375 19.95,34.075 19.575,33.7 14.675,33.7 14.525,33.7 14.125,34.1 14.125,35.875
GND on Top Layer "123" (solid, remove dead copper, pour order 76): -0.025,99.408 39.032,99.408 39.157,99.241 48.325,87.036 48.325,86.869 48.325,58.866 41.01,49.128 40.35,48.25 19.158,48.25 10.681,48.25 3.743,57.487 0.101,62.335 0.101,99.575
GND on Top Layer "123" (solid, remove dead copper, pour order 77): 77.25,101.924 77.25,101.76 73.933,98.166 73.933,89.882 73.933,89.498 77.402,85.74 78.238,84.835 98.039,84.835 98.292,84.835 110.801,71.284 111.054,71.01 111.054,49.35 133.677,49.35 136.3,52.192 136.199,52.302 136.199,92.378 136.199,93.75 128.071,102.555 127.488,101.924 77.301,101.924
GND on Top Layer "123" (solid, remove dead copper, pour order 80): 15.8,52.45 16.575,52.45 18.875,50.15 18.85,50.125 17.75,50.125 15.275,50.125 14.4,51 14.975,51.575 14.975,52.475
GND on Top Layer "123" (solid, remove dead copper, pour order 92): 94.7,87.33 94.75,87.236 94.75,22.425 112.525,22.425 112.8,22.941 113.175,23.645 113.175,90.85 94.95,90.85 94.75,91.225
NetC2_U_EMI_Prot_Circ2_1 on Top Layer "123" (solid, remove dead copper, pour order 94): 113.489,24.6 116.25,27.475 116.25,27.825 116.25,41.7 115.458,42.525 113.465,42.525 108.491,42.525 108.385,42.415 108.495,42.3 108.495,24.6
GND on Top Layer "123" (solid, remove dead copper, pour order 96): 112.375,49.775 112.375,60.375 112.3,60.45 134.45,60.45 134.45,12.85 128.4,6.8 128.25,6.95 112.05,6.95
NetBAT_IN_2 on Top Layer "123" (solid, remove dead copper, pour order 98): 110.3,13.1 110.3,14.8 116.05,20.55 116.25,20.75 116.25,43.575 116.8,43.575 118.175,42.2 118.225,42.15 118.225,19.425 117.675,19.425 110.55,12.3 110.3,12.55 110.3,13.1
NetC2_U_EMI_Prot_Circ1_1 on Top Layer "123" (solid, remove dead copper, pour order 139): 15,19.325 16.8,19.325 22.05,24.575 20.65,25.975 15.975,25.975 15.975,25.925 16.925,24.975 17.075,24.825 17.075,24.25 17.075,23.575 15.05,21.55 15,21.5 15,19.325
GND on Top Layer "123" (solid, remove dead copper, pour order 141): 4.132,56.262 4.132,11.793 7.125,8.8 8.9,7.025 32.55,7.025 37.05,7.025 48.475,18.45 48.15,18.775 48.15,59.317 5.392,59.317 4.575,58.5 4.05,57.975 4.05,56.05

## Keep-outs
Keep-Out Layer:
  lines w1: 0.6,13.1 0.6,78.951 0.6,94.225 8.425,102.05 127.475,102.05 135.075,94.45 135.075,12.525 128.705,6.155 7.545,6.155 0.6,13.1
Mechanical 3:
  circle w0.4: c458.4,332.4 r1.5
  circle w0.4: c6.75,95.875 r1.5
  circle w0.4: c6.775,11.75 r1.5
  circle w0.4: c129.65,11.85 r1.5
  circle w0.4: c129.15,95.475 r1.5

## Text inside footprints (layer, text, board x,y; h text height)
CANC1: Top Overlay "6" at 86.605,11.925 h1.5 r180; Top Overlay "9" at 78.295,11.925 h1.5 r180; Top Overlay "1" at 87.74,21.325 h1.5 r180; Top Overlay "5" at 76.91,21.325 h1.5 r180
CANC2: Top Overlay "6" at 49.93,12 h1.5 r180; Top Overlay "9" at 41.62,12 h1.5 r180; Top Overlay "5" at 40.235,21.4 h1.5 r180; Top Overlay "1" at 51.065,21.4 h1.5 r180